# Altium PCB Tile-carrier.PcbDoc
Units mil, origin at the board's own origin, x right, y up, seen from the top; angles counter-clockwise.
Board outline 1510.03 x 2470.03 mil, 2 copper layers (Top Layer, Bottom Layer); 3 components, 5 nets, 36 pads, 134 vias.
Unrouted connection lines stored in the file: 12.
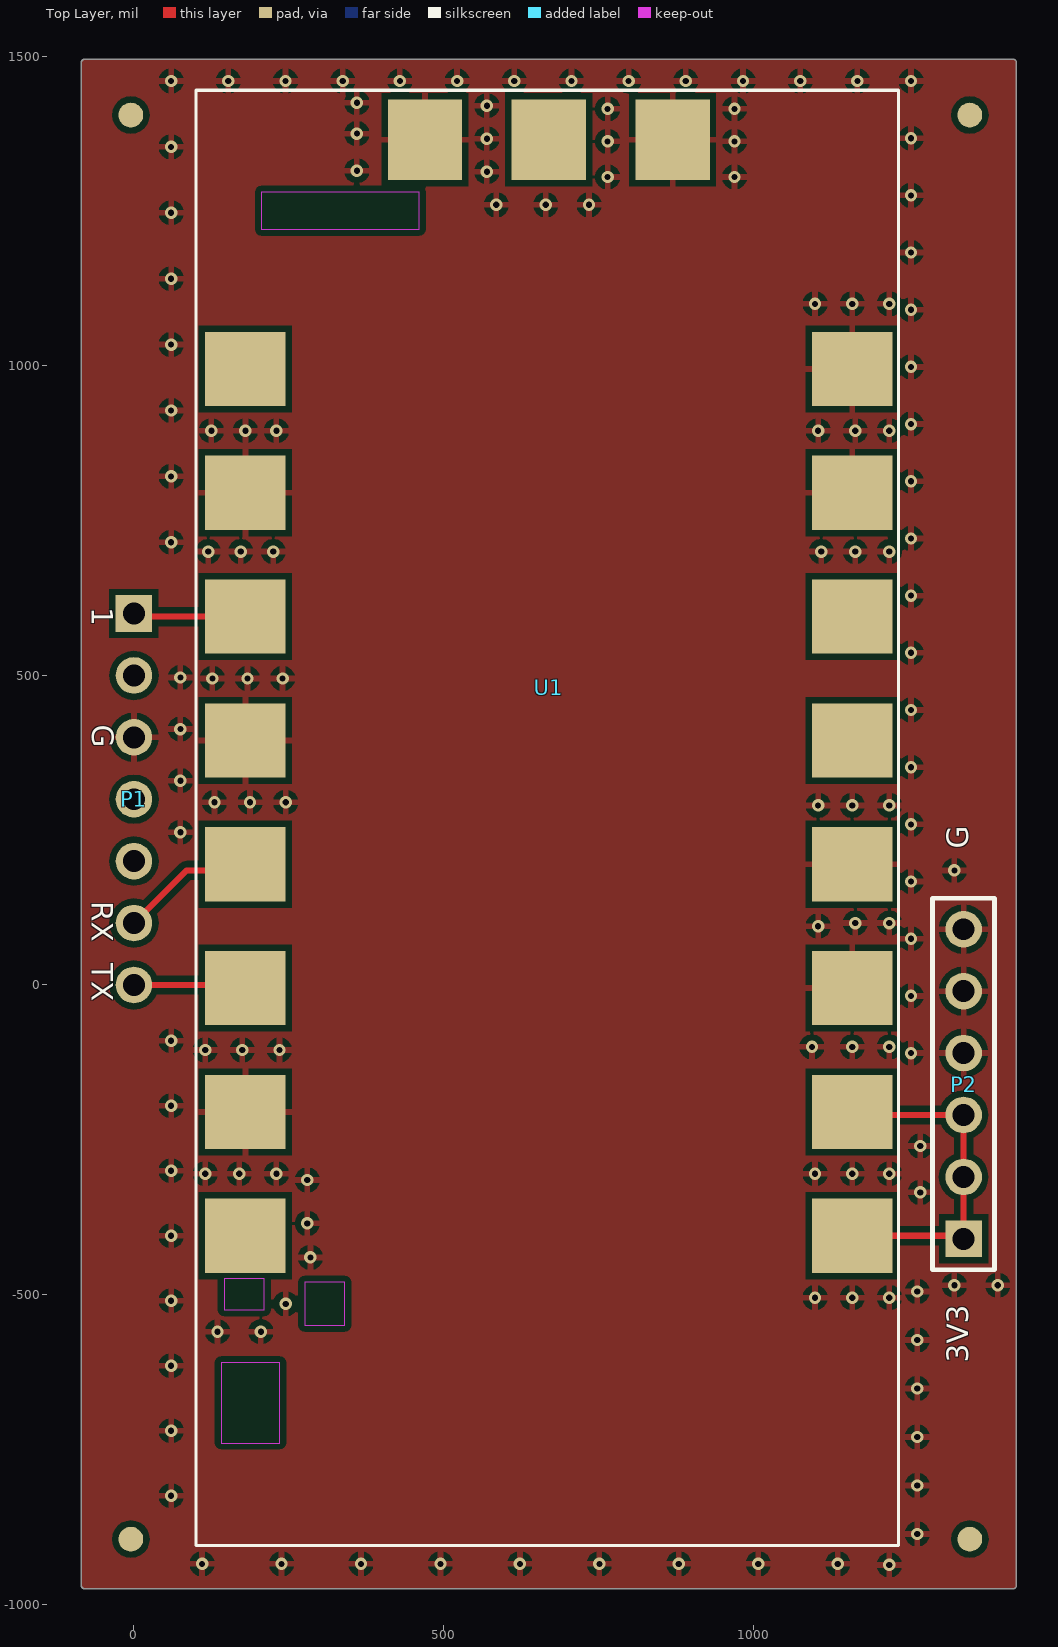
[diagram p0: Top Layer view]
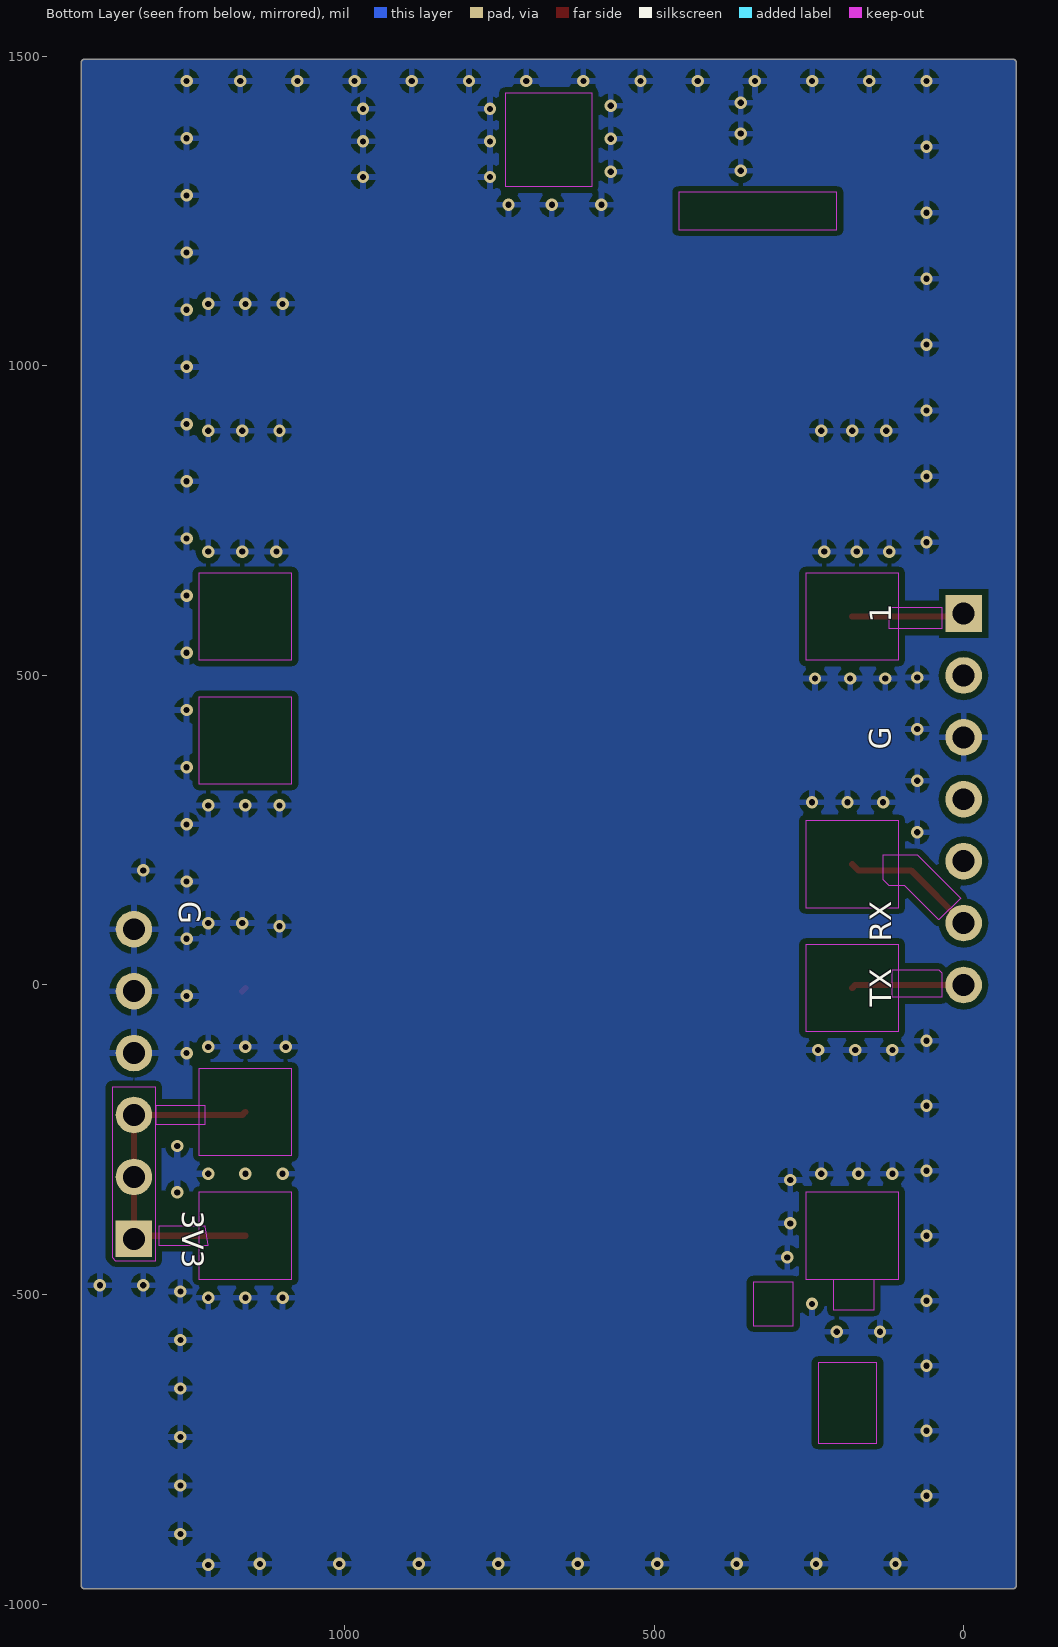
[diagram p1: Bottom Layer view, seen from below]

## Layer stack, top to bottom
Top Solder: solder mask 0.4, Solder Resist, Dk 3.5
Top Layer: signal copper 1.4
Dielectric 1: dielectric 12.6, FR-4, Dk 4.8
Bottom Layer: signal copper 1.4
Bottom Solder: solder mask 0.4, Solder Resist, Dk 3.5

## Board outline
-85.01,-970 ccw(c-80,-970) -80,-975.02 1420,-975.02 ccw(c1420,-970) 1425.01,-970 1425.01,1490 ccw(c1420,1490) 1420,1495.02 -80,1495.02 ccw(c-80,1490) -85.01,1490

## Design rules (kind name [scope] priority, off if disabled: settings)
Clearance [All] p1: gap=10 ignorepadtopadclearanceinfootprint=FALSE except(0: Arc-Hole Track-Hole SMDPad-Hole THPad-Hole Via-Hole Fill-Hole Poly-Hole Region-Hole Text-Hole)
PolygonConnect [All] p1: connectstyle=Relief reliefconductorwidth=10 reliefentries=4 polygonreliefangle="90 Angle" airgapwidth=10
RoutingVias [All] p1: holewidth=28 width=50 viastyle="Through Hole" minholewidth=28 minwidth=50 maxholewidth=28 maxwidth=50
SolderMaskExpansion [All] p1: expansion=4 istentingtop=FALSE
Width [All] p1: maxlimit=10 minlimit=10 preferedwidth=10
30 further rules are at their usual default settings.

## Components (designator, comment, footprint, x,y, rotation, side; value= is the part's Value field where it differs from the comment)
P1 "Header 7" HDR1X7 0,600 r270 top
P2 "Header 6" HDR1X6 1340,-410 r90 top
U1 "" "Tile01 Rev A1" 1160,-405 r90 top value=VHF

## Footprints (in the part's own frame and the unit in brackets; to place one, negate y for a bottom-side part, rotate by r counter-clockwise, add the part's x,y. Pads: shape width x height; smd on the part's side, far side on the other; paste and mask are expansions set on the pad)
HDR1X6 [mm] "Connector; Header; 6 Position"
  rect 1.5x1.5 hole 0.9: 1(0,0)
  round 1.5 hole 0.9: 2(2.54,0) 3(5.08,0) 4(7.62,0) 5(10.16,0) 6(12.7,0)
  silkscreen extent -1.27,-1.27 13.97,1.27
HDR1X7 [mm] "Connector; Header; 7 Position"
  rect 1.5x1.5 hole 0.9: 1(0,0)
  round 1.5 hole 0.9: 2(2.54,0) 3(5.08,0) 4(7.62,0) 5(10.16,0) 6(12.7,0) 7(15.24,0)
"Tile01 Rev A1" [mil] "SWARM Tile01: Ax Footprint"
  rect 120x130 smd: 1(0,0) 2(200,0) 3(400,0) 4(600,0) 5(800,0) 6(1000,0) 7(1200,0) 8(1400,0) 12(1400,980) 13(1200,980) 14(1000,980) 15(800,980) 16(600,980) 17(400,980) 18(200,980) 19(0,980)
  rect 130x120 smd: 9(1770,290) 10(1770,490) 11(1770,690)
  Top Layer keep-out region: -144.75,819.25 -74.75,819.25 -74.75,884.25 -144.75,884.25
  Top Layer keep-out region: 1625.25,699.25 1685.25,699.25 1685.25,954.25 1625.25,954.25
  Top Layer keep-out region: -119.75,949.25 -69.75,949.25 -69.75,1014.25 -119.75,1014.25
  Top Layer keep-out region: -334.75,924.25 -204.75,924.25 -204.75,1019.25 -334.75,1019.25
  silkscreen extent -500,-75 1850,1060, body extent -485,-51 1825,1033, height 238

## Part data
P1: "Header, 7-Pin", LatestRevisionDate=17-Jul-2002, LatestRevisionNote="Re-released for DXP Platform.", Publisher="Altium Limited"
P2: "Header, 6-Pin", LatestRevisionDate=17-Jul-2002, LatestRevisionNote="Re-released for DXP Platform.", Publisher="Altium Limited"
U1: library part "Tile01 Rev A1", "SWARM: Tile01 Rev A1 VHF", MANUF1=SWARM, MANUF1 P/N=Tile01_Rev_A1, TEMP="-40°C ~ 85°C (TA)", Voltage=3V3, Size=MOD, Supplier=Swarm

## Free pads (board coordinates)
  round 40 smd paste-20 mask+5: 0(-5,-895) 0(-5,1405) 0(1350,-895) 0(1350,1405)

## Via types
v1: diameter 20, hole 10, Top Layer to Bottom Layer, 134 vias

## Nets (pads, with @x,y where several pads share a name; then routed paths per layer and width w, separated by ;. In a path a pad name is that pad's centre, name@x,y a point inside that pad or via, vN(x,y) a via of type N, cw(c..) or ccw(c..) an arc to the next point about the centre after c; other vN are vias at no path point)
3V3: P2.1 P2.2 P2.3 U1.1 U1.2 | length 564.1
  Top Layer w10: U1.1 1335,-405 P2.1 P2.2 P2.3 1165,-210 U1.2
GND: P1.3 P2.4 P2.5 P2.6 U1.3 U1.4 U1.7 U1.8 U1.9 U1.11 U1.13 U1.15 U1.18 | length 7.1
  Top Layer w10: U1.3 U1.3@1165,-10
  other v1: 1220,-936.67 110,-935 238.33,-935 366.67,-935 495,-935 623.33,-935 751.67,-935 880,-935 1008.33,-935 1136.67,-935 1265,-886.67 60,-825 1265,-808.33 1265,-730 60,-720 1265,-651.67 60,-615 1265,-573.33 135,-560 205,-560 245,-515 60,-510 1100,-505 1160,-505 1220,-505 1265,-495 1325,-485 1395,-485 285,-440 60,-405 280,-385 1270,-335 280,-315 115,-305 170,-305 230,-305 1100,-305 1160,-305 1220,-305 60,-300 1270,-260 60,-195 1255,-110 115,-105 175,-105 235,-105 1095,-100 1160,-100 1220,-100 60,-90 1255,-17.65 1255,74.71 1105,95 1165,100 1220,100 1255,167.06 1325,185 75,246.67 1255,259.41 1105,290 1160,290 1220,290 130,295 187.5,295 245,295 75,330 1255,351.76 75,413.33 1255,444.12 126.67,495 183.33,495 240,495 75,496.67 1255,536.47 1255,628.82 120,700 172.5,700 225,700 1110,700 1165,700 1220,700 60,715 1255,721.18 1255,813.53 60,821.43 125,895 180,895 230,895 1105,895 1165,895 1220,895 1255,905.88 60,927.86 1255,998.23 60,1034.29 1255,1090.59 1100,1100 1160,1100 1220,1100 60,1140.71 1255,1182.94 60,1247.14 585,1260 665,1260 735,1260 1255,1275.29 765,1305 970,1305 570,1313.33 360,1315 60,1353.57 765,1362.5 970,1362.5 570,1366.67 1255,1367.65 360,1375 765,1415 970,1415 570,1420 360,1425 60,1460 152.37,1460 244.73,1460 337.1,1460 429.47,1460 521.84,1460 614.2,1460 706.57,1460 798.94,1460 891.3,1460 983.67,1460 1076.04,1460 1168.4,1460 1255,1460
GPIO_1: P1.1 U1.14 | length 182.1
  Top Layer w10: P1.1 5,595 U1.14
SERIAL_RX: P1.6 U1.16 | length 219.4
  Top Layer w10: P1.6 85,185 170,185 U1.16
SERIAL_TX: P1.7 U1.17 | length 182.1
  Top Layer w10: P1.7 175,0 U1.17
pads on no net: P1.2 P1.4 P1.5 U1.5 U1.6 U1.10 U1.12 U1.19

## Polygon pours and split planes (outlines as drawn)
GND on Top Layer "GND_L01_P000" (solid, pour order 0): -85.01,-970 ccw(c-80,-970) -80,-975.02 1420,-975.02 ccw(c1420,-970) 1425.01,-970 1425.01,1490 ccw(c1420,1490) 1420,1495.02 -80,1495.02 ccw(c-80,1490) -85.01,1490
GND on Bottom Layer "GND_L02_P001" (solid, pour order 1): -85.01,-970 ccw(c-80,-970) -80,-975.02 1420,-975.02 ccw(c1420,-970) 1425.01,-970 1425.01,1490 ccw(c1420,1490) 1420,1495.02 -80,1495.02 ccw(c-80,1490) -85.01,1490

## Keep-outs
Bottom Layer:
  region: 35,610 35,575 120,575 120,610
  region: 1305,-165 1375,-165 1375,-440 1370,-445 1305,-445
  region: 1225,-390 1300,-390 1300,-420 1220,-420
  region: 1225,-195 1305,-195 1305,-225 1225,-225
  region: 115,25 40,25 35,20 35,-20 115,-20
  region: 40,105 95,160 120,160 130,170 130,210 75,210 5,140
  region: 140,-610 235,-610 235,-740 140,-740
  region: 210,-525 210,-475 145,-475 145,-525
  region: 275,-480 340,-480 340,-550 275,-550
  region: 105,-475 105,-335 255,-335 255,-475
  region: 105,525 105,665 255,665 255,525
  region: 105,125 105,265 255,265 255,125
  region: 105,-75 105,65 255,65 255,-75
  region: 1085,-475 1085,-335 1235,-335 1235,-475
  region: 1085,-275 1085,-135 1235,-135 1235,-275
  region: 1085,325 1085,465 1235,465 1235,325
  region: 1085,525 1085,665 1235,665 1235,525
  region: 205,1280 460,1280 460,1220 205,1220
  region: 600,1440 740,1440 740,1290 600,1290

## Silkscreen, mask and mechanical layers (free items; w line width, h text height)
Top Overlay:
  text "1" at -80,610 h60 r270
  text "G" at -79.33,420 h60 r270
  text "G" at 1359.33,220 h60 r90
  text "RX" at -80,135 h60 r270
  text "TX" at -80,35 h60 r270
  text "3V3" at 1359.33,-610 h60 r90
Bottom Overlay:
  text "1" at 105,585 h60 r270
  text "G" at 105.67,380 h60 r270
  text "G" at 1279.33,135 h60 r90
  text "RX" at 105,70 h60 r270
  text "TX" at 105,-35 h60 r270
  text "3V3" at 1274.33,-365 h60 r90
Mechanical 1:
  lines w10: -70,-970 -80,-960 ; -80,-960 -80,1490 1420,1490 1420,-970 -80,-970 -80,-960